# Allegro board Mixer Template.brd
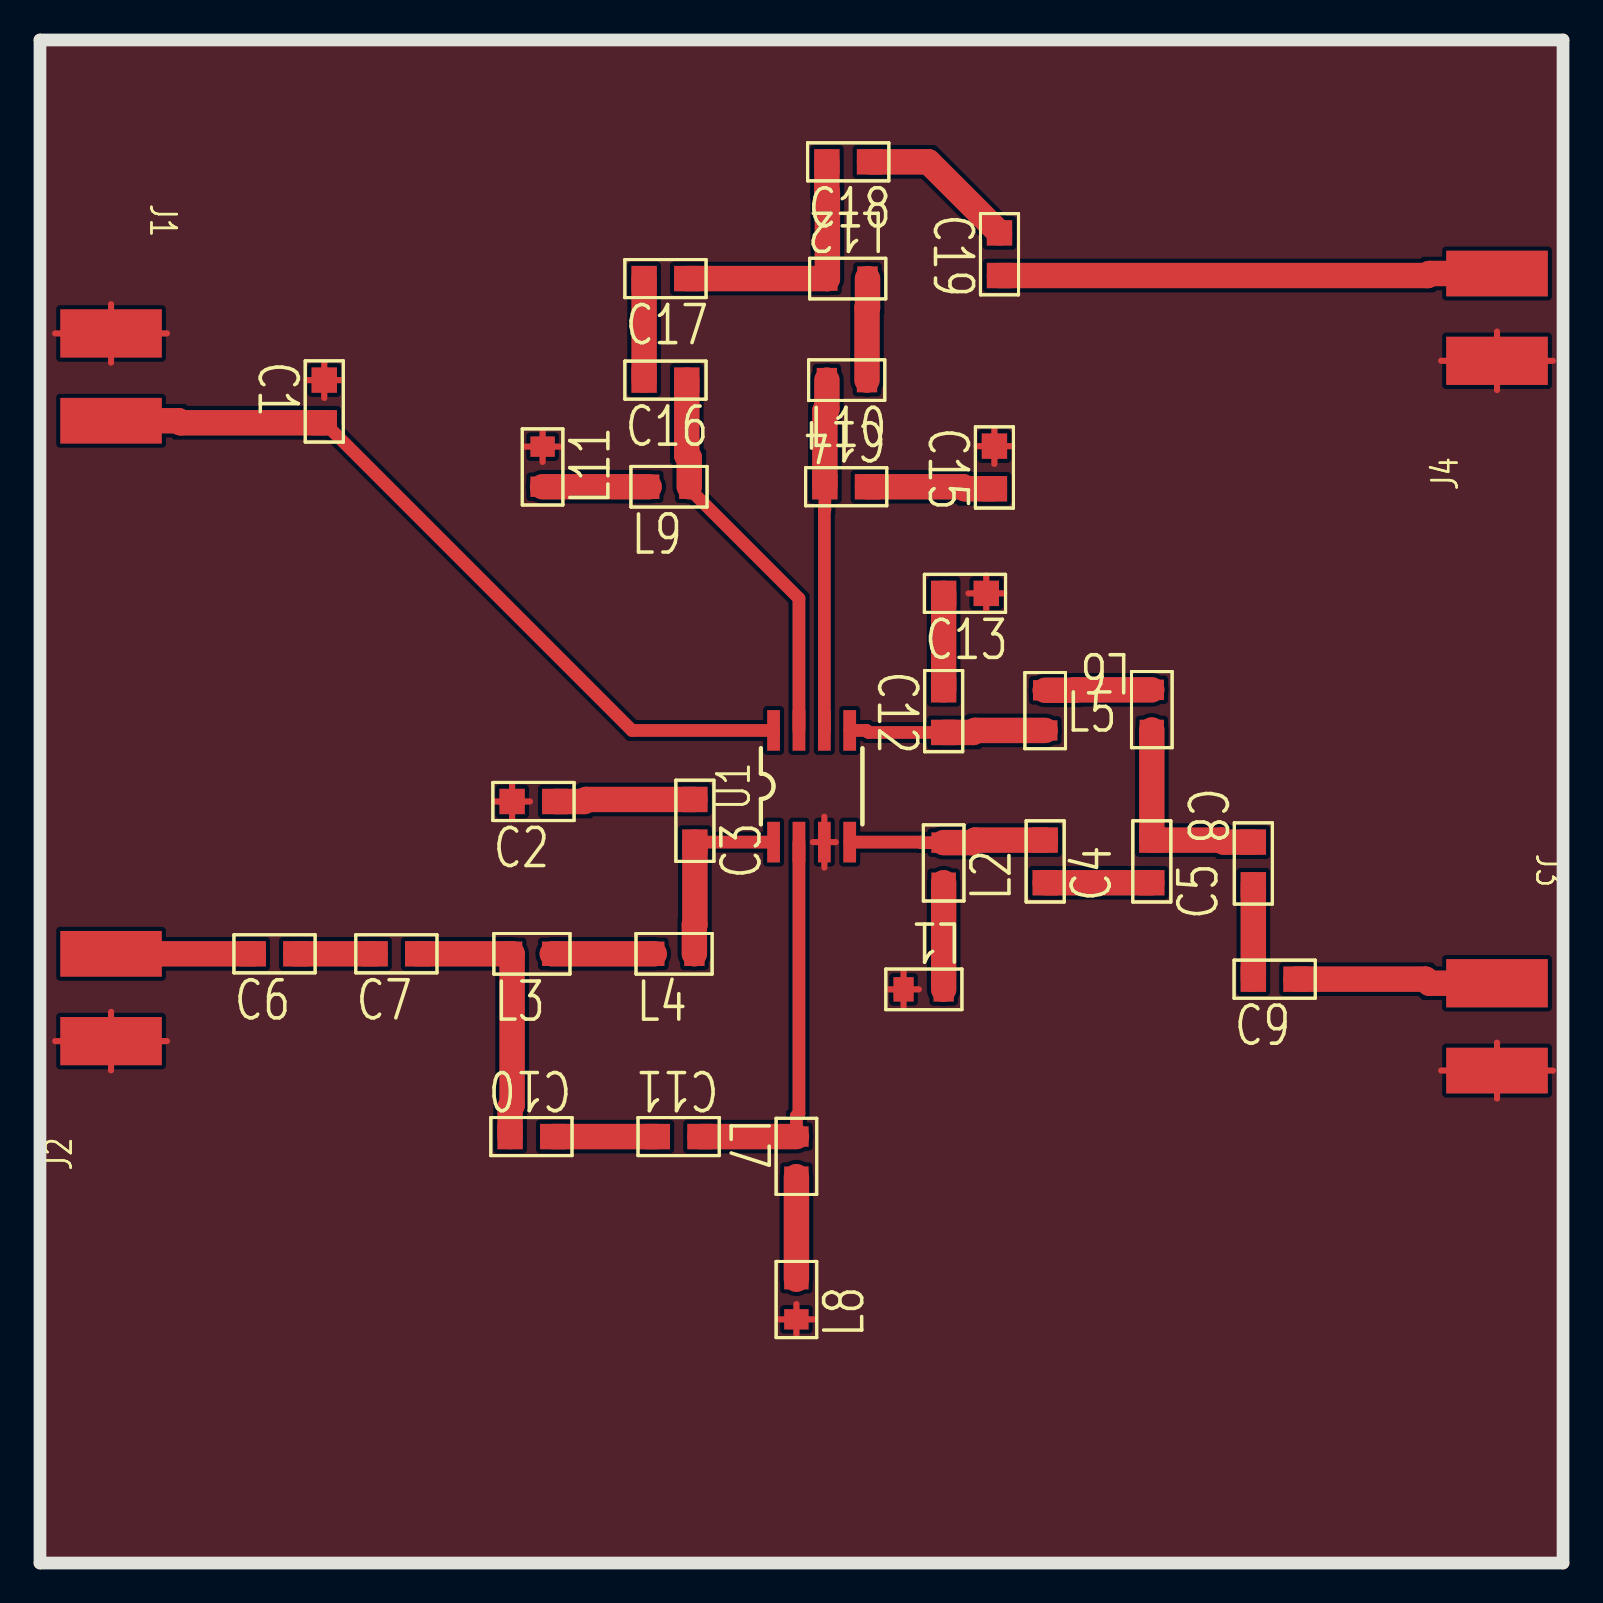
[diagram p0: board, top side]
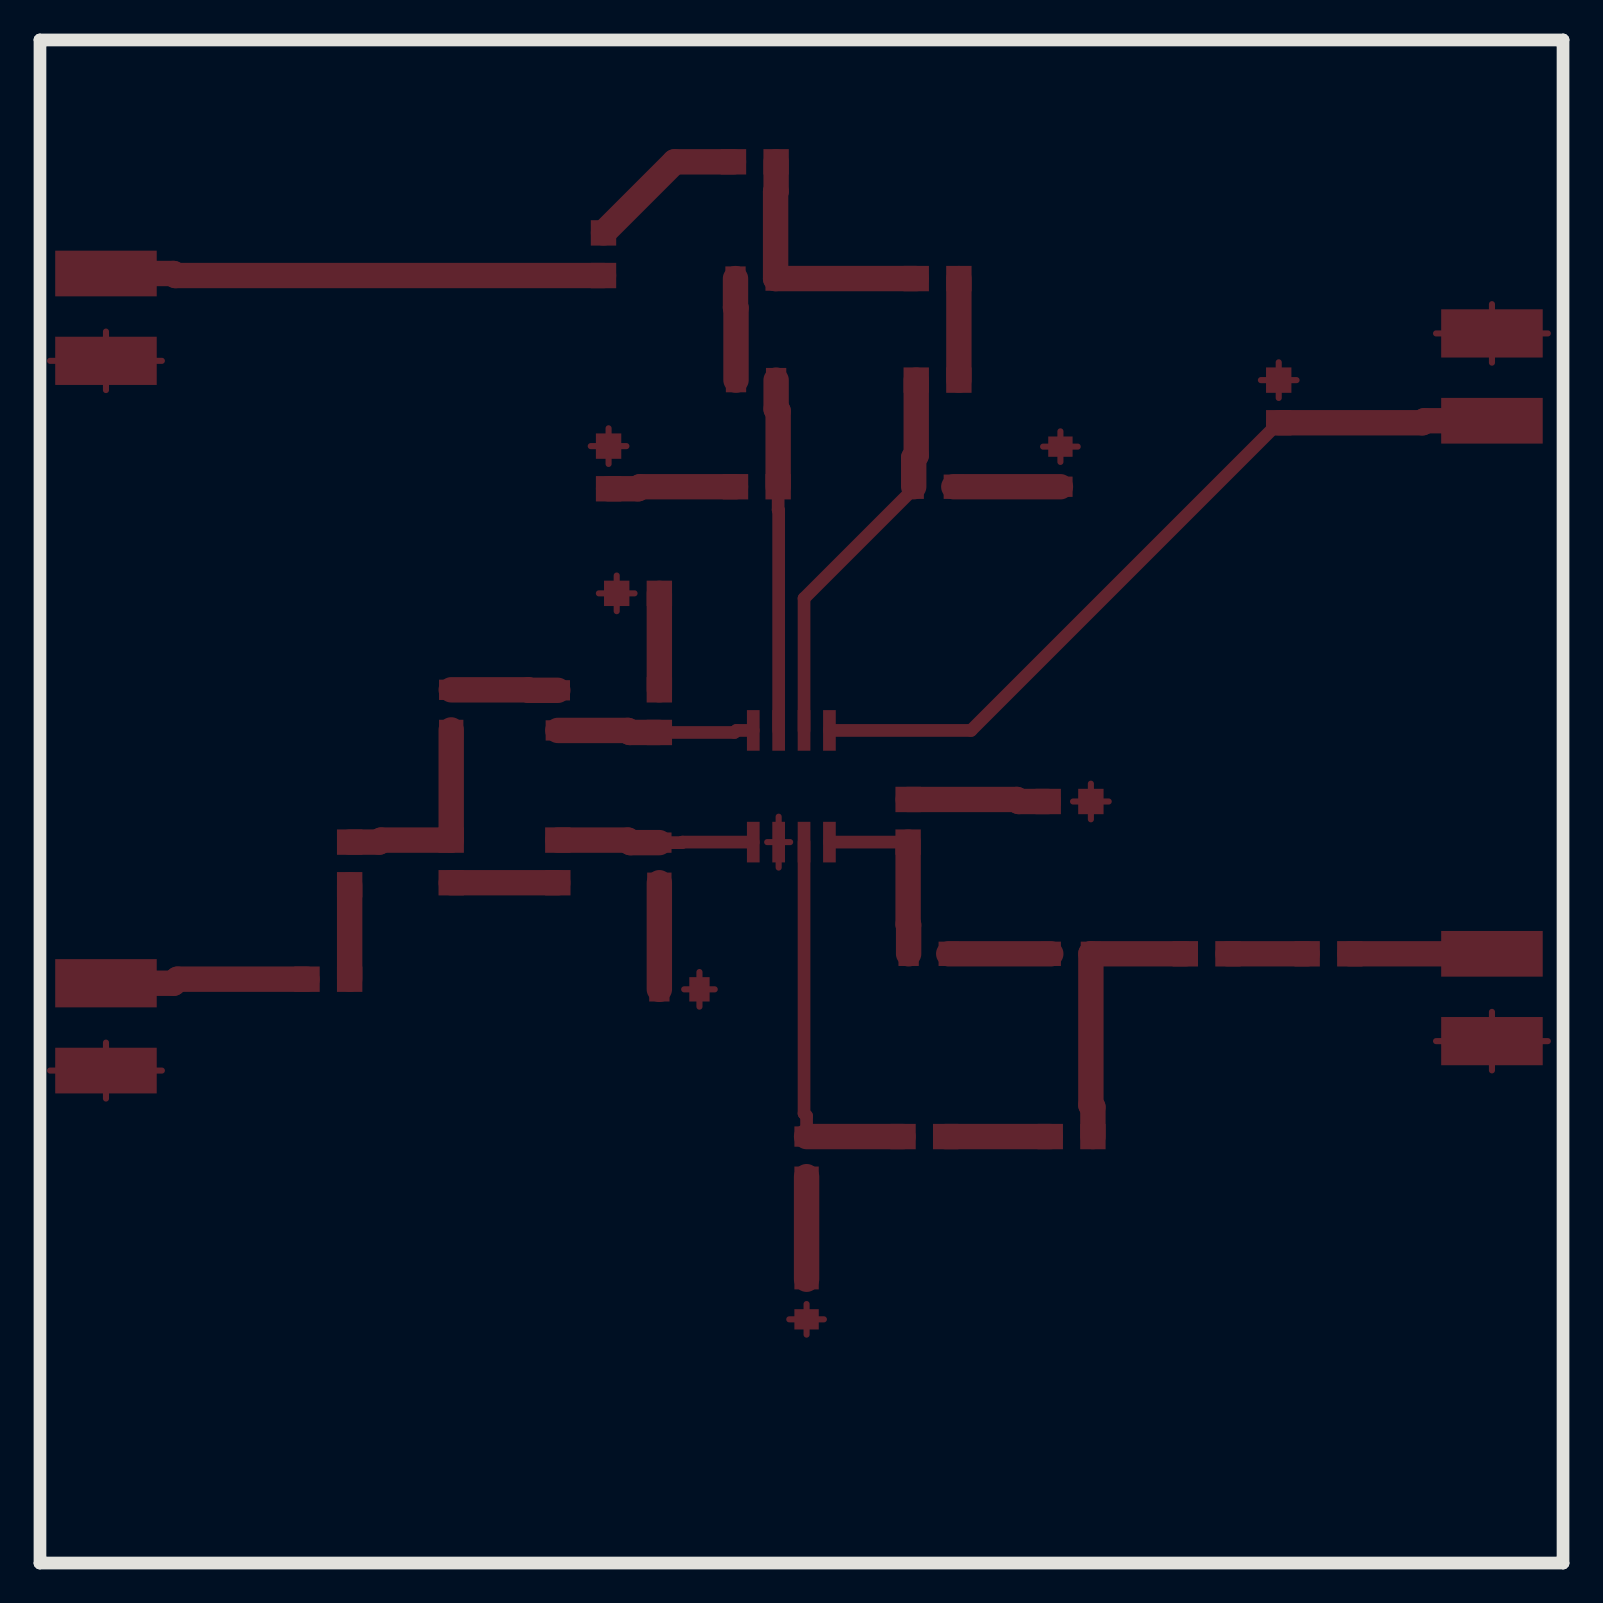
[diagram p1: board, bottom side, seen from below]

Outline 76.2 x 76.2 mm; copper layers: TOP, BOTTOM. Coordinates in mm from the lower left corner of the outline.
Outline path: 0,76.2 76.2,76.2 76.2,0 0,0 0,76.2

## Design rules (mm)
constraint set DEFAULT: min track width 0.305

## Placement (name value [footprint] x y rotation side)
C1  C NP  [SMC0805]  14.22 59.18 270 top
C2  C NP  [SMC0805]  23.62 38.1 0 top
C3  C NP  [SMC0805]  32.77 36.07 90 top
C4  C NP  [SMC0805]  50.29 34.04 90 top
C5  C NP  [SMC0805]  55.63 34.04 90 top
C6  C NP  [SMC0805]  10.67 30.48 0 top
C7  C NP  [SMC0805]  16.76 30.48 0 top
C8  C NP  [SMC0805]  60.71 36.07 270 top
C9  C NP  [SMC0805]  60.71 29.21 0 top
C10  C NP  [SMC0805]  25.65 21.34 180 top
C11  C NP  [SMC0805]  33.02 21.34 180 top
C12  C NP  [SMC0805]  45.21 43.69 270 top
C13  C NP  [SMC0805]  45.21 48.51 0 top
C14  C NP  [SMC0805]  41.4 53.85 180 top
C15  C NP  [SMC0805]  47.75 55.88 270 top
C16  C NP  [SMC0805]  30.23 59.18 0 top
C17  C NP  [SMC0805]  30.23 64.26 0 top
C18  C NP  [SMC0805]  39.37 70.1 0 top
C19  C NP  [SMC0805]  48.01 66.55 270 top
J1  2Pin Header  [SMA_440W_200L]  6.1 62.74 270 top
J2  2Pin Header  [SMA_440W_200L]  1.02 24.89 90 top
J3  2Pin Header  [SMA_440W_200L]  75.44 30.23 270 top
J4  2Pin Header  [SMA_440W_200L]  70.36 58.93 90 top
L1  INDUCTOR  [SML0805]  45.21 28.7 180 top
L2  INDUCTOR  [SML0805]  45.21 34.04 90 top
L3  INDUCTOR  [SML0805]  23.62 30.48 0 top
L4  INDUCTOR  [SML0805]  30.73 30.48 0 top
L5  INDUCTOR  [SML0805]  50.29 41.66 90 top
L6  INDUCTOR  [SML0805]  55.63 43.69 270 top
L7  INDUCTOR  [SML0805]  37.85 21.34 270 top
L8  INDUCTOR  [SML0805]  37.85 12.19 90 top
L9  INDUCTOR  [SML0805]  30.48 53.85 0 top
L10  INDUCTOR  [SML0805]  39.37 59.18 0 top
L11  INDUCTOR  [SML0805]  25.15 53.85 90 top
L12  INDUCTOR  [SML0805]  41.4 64.26 180 top
U1  SA602  [SO8]  38.61 38.86 90 top

## Library data of the parts
C1-C19 = C NP
J1-J4 = 2Pin Header
L1-L12 = INDUCTOR
U1 = SA602

## Footprints (pads in the part's own frame, mm; a bottom-side part is the same pattern mirrored in y, then rotated)
SMA_440W_200L
  rect 2.286x5.08 smd: 1(5.588,-2.54)
  rect 2.413x5.08 smd: 2(1.219,-2.54)
SMC0805
  rect 1.27x1.27 smd: 1(0,0) 2(2.134,0)
SML0805
  rect 1.016x1.219 smd: 1(0,0) 2(2.007,0)
SO8
  rect 2.032x0.635 smd: 1(-2.794,1.905) 2(-2.794,0.635) 3(-2.794,-0.635) 4(-2.794,-1.905) 5(2.794,-1.905) 6(2.794,-0.635) 7(2.794,0.635) 8(2.794,1.905)

## Nets
GND: C1.1 C2.1 C13.2(B) C15.1 J1.2 J2.2 J3.1 J4.2 L1.2 L8.1 L11.2 U1.3
N00504: C11.1 L7.1 U1.2
N00508: L7.2 L8.2
N00592: C3.1 L4.2 U1.1
N00605: L3.2 L4.1
N00650: C7.2(B) C10.2(B) L3.1
N00668: C6.2(B) C7.1
N00700: C10.1 C11.2(B)
N00864: C16.2(B) L9.2 U1.7
N00963: C14.1 C15.2(B)
N01037: C14.2(B) L10.1 U1.6
N01055: L10.2 L12.1
N01166: C17.2(B) C18.1 L12.2
N01195: C18.2(B) C19.1
N01258: C16.1 C17.1
N01317: C12.2(B) L5.1 U1.5
N01324: C12.1 C13.1
N01447: L5.2 L6.1
N01557: C4.2(B) L2.2 U1.4
N01566: C4.1 C5.1
N01570: C5.2(B) C8.1 L6.2
N01586: C8.2(B) C9.1
N01963: C6.1 J2.1
N01975: C19.2(B) J4.1
N02063: C9.2(B) J3.2
N02165: C1.2(B) J1.1 U1.8(VCC)
N002761: C2.2(B) C3.2(B)
N004560: L9.1 L11.1
N014700: L1.1 L2.1

## Routing (per net, layer and track width the routed paths; a pad name or vN(x,y) marks a point on that pad's centre or on a via; arc(x,y) is an arc through that point)
GND: length 61.7
  TOP w0.305: 70.1,60.15 J4.2 ; J4.2 72.9,58.68 ; J4.2 72.9,61.61 ; J4.2 75.69,60.15 ; 38.67,36.07 U1.3 ; U1.3 39.82,36.07 ; U1.3 39.24,34.8 ; U1.3 39.24,37.34 ; 24.28,55.85 L11.2 ; L11.2 26.01,55.85 ; L11.2 25.15,56.62 ; L11.2 25.15,55.09 ; J3.1 75.69,24.64 ; J3.1 72.9,23.24 ; J3.1 70.1,24.64 ; J3.1 72.9,26.04 ; 23.62,37.21 C2.1 ; C2.1 22.73,38.1 ; C2.1 23.62,38.99 ; C2.1 24.51,38.1 ; 0.76,61.52 J1.2 ; J1.2 3.56,62.98 ; J1.2 3.56,60.06 ; J1.2 6.35,61.52 ; L1.2 43.97,28.7 ; L1.2 43.21,29.57 ; L1.2 43.21,27.84 ; L1.2 42.44,28.7 ; 37.85,11.43 L8.1 ; L8.1 37.85,12.96 ; L8.1 38.71,12.19 ; L8.1 36.98,12.19 ; 46.45,48.51 C13.2 ; C13.2 47.35,47.62 ; C13.2 47.35,49.41 ; C13.2 48.24,48.51 ; C15.1 48.64,55.88 ; C15.1 47.75,54.99 ; C15.1 47.75,56.77 ; C15.1 46.86,55.88 ; 3.56,24.65 J2.2 ; J2.2 6.35,26.11 ; J2.2 0.76,26.11 ; J2.2 3.56,27.57 ; C1.1 14.22,60.07 ; C1.1 14.22,58.29 ; C1.1 13.33,59.18 ; C1.1 15.12,59.18
N00504: length 19.6
  TOP w0.635: U1.2 37.97,22.49 37.85,22.37 L7.1
  TOP w1.27: C11.1 L7.1
N00508: length 5.1
  TOP w1.27: L7.2 L8.2
N00592: length 9.5
  TOP w0.635: C3.1 U1.1
  TOP w1.27: L4.2 32.74,31.93 32.77,31.95 C3.1
N00605: length 5.1
  TOP w1.27: L3.2 L4.1
N00650: length 13.9
  TOP w1.27: C10.2 23.52,22.81 23.62,22.91 L3.1 C7.2
N00668: length 4
  TOP w1.27: C6.2 C7.1
N00700: length 5.2
  TOP w1.27: C10.1 C11.2
N00864: length 19.9
  TOP w0.635: L9.2 32.49,53.75 37.97,48.26 U1.7
  TOP w1.27: C16.2 32.36,55.42 32.49,55.3 L9.2
N00963: length 6.4
  TOP w1.27: C15.2 46.28,53.75 46.18,53.85 C14.1
N01037: length 17.6
  TOP w0.635: C14.2 39.27,52.69 39.24,52.66 U1.6
  TOP w1.27: C14.2 39.27,57.63 39.37,57.73 L10.1
N01055: length 5.1
  TOP w1.27: L10.2 41.38,62.79 41.4,62.81 L12.1
N01166: length 12.9
  TOP w1.27: C17.2 L12.2 39.4,68.61 39.37,68.63 C18.1
N01195: length 8
  TOP w1.27: C19.1 44.45,70.1 C18.2
N01258: length 5.1
  TOP w1.27: C17.1 C16.1
N01317: length 9.9
  TOP w0.635: C12.2 41.46,41.55 41.35,41.66 U1.5
  TOP w1.27: L5.1 46.79,41.66 46.69,41.55 C12.2
N01324: length 4.8
  TOP w1.27: C12.1 C13.1
N01447: length 5.3
  TOP w1.27: L5.2 51.74,43.66 51.77,43.69 L6.1
N01557: length 9.8
  TOP w0.635: U1.4 44.05,36.07 44.08,36.04 L2.2
  TOP w1.27: L2.2 46.66,36.04 46.79,36.17 C4.2
N01566: length 5.3
  TOP w1.27: C4.1 C5.1
N01570: length 10.6
  TOP w1.27: C8.1 59.23,36.07 59.13,36.17 C5.2 L6.2
N01586: length 4.7
  TOP w1.27: C8.2 C9.1
N01963: length 7.1
  TOP w1.27: J2.1 C6.1
N01975: length 24.9
  TOP w1.27: C19.2 69.42,64.41 69.52,64.52 J4.1
N02063: length 10.1
  TOP w1.27: C9.2 69.32,29.21 69.52,29.01 J3.2
N02165: length 39.6
  TOP w0.635: U1.8 29.62,41.66 C1.2
  TOP w1.27: J1.1 6.93,57.15 7.04,57.05 C1.2
N002761: length 7.1
  TOP w1.27: C2.2 27.23,38.1 27.33,38.2 C3.2
N004560: length 5.3
  TOP w1.27: L9.1 L11.1
N014700: length 5.3
  TOP w1.27: L2.1 L1.1

## Copper pours and planes (outline as drawn; the poured copper is in the pictures)
GND on TOP: 0,76.2 0,0 76.2,0 76.2,76.2
